# Altium PCB CW6680E LQFP48 BT Boombox S10 V1.0.PcbDoc (part 2 of 2)
Units mil, origin at the board's own origin, x right, y up, seen from the top; angles counter-clockwise.
Board outline 2057.09 x 1663.06 mil, 2 copper layers (Top Layer, Bottom Layer); 63 components, 61 nets, 239 pads, 208 vias.
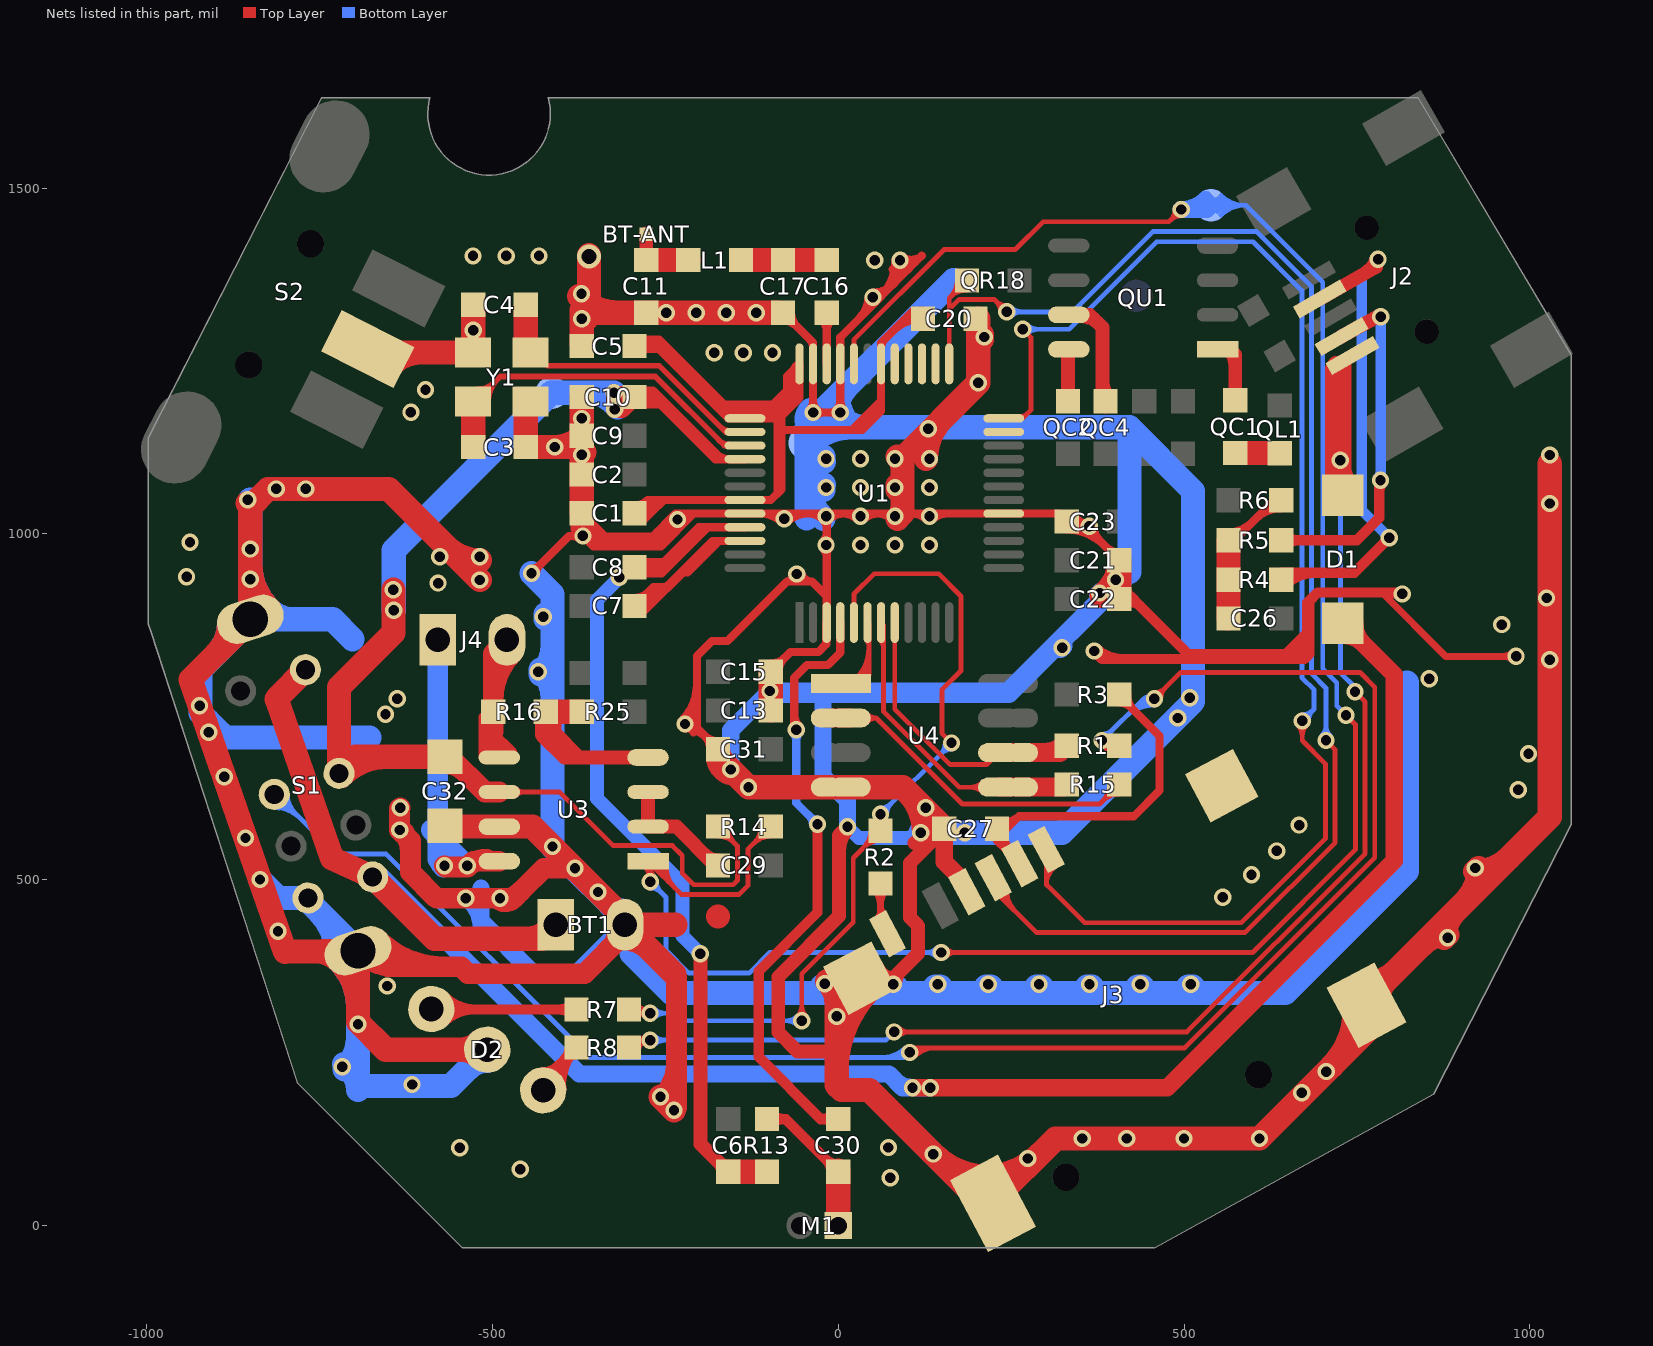
[diagram p2: the nets of this part, all layers, seen from the top]

## Via types
v1: diameter 25, hole 15, Top Layer to Bottom Layer, 206 vias
v2: diameter 28, hole 18, Top Layer to Bottom Layer, 1 vias
v3: diameter 35, hole 22, Top Layer to Bottom Layer, 1 vias

## Nets (pads, with @x,y where several pads share a name; then routed paths per layer and width w, separated by ;. In a path a pad name is that pad's centre, name@x,y a point inside that pad or via, vN(x,y) a via of type N, cw(c..) or ccw(c..) an arc to the next point about the centre after c; other vN are vias at no path point) (continued)
GND: BT1.2 C1.2 C2.2 C3.1 C4.1 C5.1 C9.1 C10.1 C11.2 C13.1 C15.1 C17.2 C20.2 C21.2 C22.2 C23.2 C27.2 C31.1 C32.1 D2.2 J3.6 J3.10 pad.0@-48.5,1131.53 S1.8 S1.9 S1.10 S2.2 U1.3 U1.17 U1.33 U1.35 U1.44 U3.7 U4.4 Y1.2 Y1.4 | length 25593.3
  Top Layer w7: U1.17@239.31,1029.26 272.94,1029.26
  Top Layer w10: C22.2@406.4,905.79 426.81,905.79 ; C22.2@417.54,900.11 cw(c426.81,895.38) 426.81,905.79 ; C22.2@417.54,911.47 ccw(c426.81,916.21) 426.81,905.79 ; 504.11,828.49 645.99,828.49 675.8,858.3 675.8,901.5 690.9,916.6 784.74,916.6 878.34,823 v1(980,823) ; v1@974.7,817.7 ccw(c961.89,804.89) 961.89,823 ccw(c961.89,841.11) v1@974.7,828.3
  Top Layer w11.81: v1(-443.3,943) -389.27,997.03 v1(-369.03,997.03) ; v1@-443.3,949.59 ccw(c-443.3,965.51) -432.04,954.26 ccw(c-420.79,943) v1@-436.71,943 ; -381,1006.54 cw(c-369.31,1006.54) C1.2@-369.96,1018.22 ; -381,1012.15 ccw(c-355.48,1012.15) v1@-372.51,993.15 ; C1.2@-378.8,1021.59 cw(c-398.59,1001.8) -370.6,1001.8 cw(c-342.61,1001.8) C1.2@-362.4,1021.59 ; v1@-373.69,992.37 ccw(c-384.95,981.11) -384.95,997.03 ccw(c-384.95,1012.95) v1@-373.69,1001.69 ; C1.2@-371.15,1013.93 cw(c-369.28,998.99) -358.64,1009.64 ; C1.2@-370.77,1029.93 ccw(c-357.41,1019.22) v1@-369.51,1007.12 ; C1.2@-370.6,1018.2 cw(c-370.6,990.21) -350.8,1010 cw(c-331.01,1029.79) -359,1029.79 ccw(c-311.23,1029.79) -345.01,996.01 ; -370.6,1049 C1.2@-381,1038.6 ; v1@-369.68,1002.21 cw(c-365.47,968.66) -341.57,992.57 ; C1.2@-369.4,1020.4 cw(c-386.02,1003.79) v1@-364.18,995.1 ; v1@-364.63,1001.94 cw(c-331.78,1038.59) C1.2@-381,1038.59 ; C1.2@-361.55,1022.54 ccw(c-347.06,1010.93) v1@-360.19,997.8 ; -356.71,1007.71 cw(c-367.86,996.56) -353.21,990.74 ; -262.91,1001.48 cw(c-232.21,970.78) -232.21,1014.19 ccw(c-232.21,998.27) -243.47,1009.53 ccw(c-254.73,1020.79) v1@-238.81,1020.79 ; -248.89,989.37 ccw(c-274.26,1014.75) v1@-238.74,1019.85 ; -232.2,1006.06 ccw(c-245.08,1018.94) v1@-227.05,1021.53 ; v1@-228.97,1026.53 ccw(c-220.78,1041.04) -209,1029.26 ; v1@-226.06,729.76 ccw(c-279.32,783.02) -204,783.02 ; v1@-221.4,718.51 cw(c-221.4,674.83) C31.1@-190.52,705.71 ; v1@-219.49,718.79 cw(c-213.33,698.37) -198.26,713.45 ; v1@-217.71,721.41 ccw(c-250.81,754.51) -204,754.51 ; -209.36,713.06 ccw(c-222.29,725.99) -204,725.99 ; C31.1@-185.19,688.79 ccw(c-213.18,688.79) -193.39,708.59 ccw(c-173.6,728.38) C31.1@-173.6,700.39 ; C31.1@-173.6,688.79 -204,719.2 -204,823.64 -182.44,845.2 -160.05,845.2 -74.19,931.05 -37.74,931.05 ; U1.44@-111.44,1029.26 cw(c-111.44,988.56) v1@-82.66,1017.34 ; C15.1@-97.6,800.79 -69.05,829.34 -28.49,829.34 -17.32,840.52 -17.32,871.06 U1.3@-16.6,871.78 -16.6,909.91 ; C15.1@-97.6,812.39 ccw(c-97.6,840.38) -77.8,820.59 ccw(c-58.01,800.79) C15.1@-86,800.79 ; C17.2@-79.6,1308.2 cw(c-79.6,1280.2) -59.8,1300 cw(c-40.02,1319.79) C17.2@-68,1319.79 ; C17.2@-79.6,1319.79 -36.28,1276.48 U1.35@-36.28,1245.79 v1(-36.28,1175.48) v1(3.09,1175.48) U1.33@3.09,1245.79 3.09,1284.27 120.86,1402.04 cw(c106.49,1416.41) v1@93.51,1400.77 ; -76.8,928.45 cw(c-60,911.65) v1@-60,935.41 ; v1@-73.34,1017.34 cw(c-44.56,988.56) -44.56,1029.26 ; v1@-65.07,940.78 ccw(c-52.73,943.75) -52.73,931.05 ; v1@-53.59,943.54 ccw(c-37.74,947.35) -37.74,931.05 ; -42.49,1029.26 cw(c-42.49,1000.51) -22.16,1020.84 cw(c-35.6,1007.4) -16.6,1007.4 ; -41.28,1281.48 cw(c-53.34,1269.41) U1.35@-36.28,1269.41 ; v1@-40.95,1180.14 ccw(c-52.2,1191.4) -36.28,1191.4 ccw(c-20.36,1191.4) -31.62,1180.14 ccw(c-20.36,1191.4) -20.36,1175.48 ccw(c-20.36,1159.56) v1@-31.62,1170.81 ; v1@-22.16,979.34 cw(c-35.6,965.9) -16.6,965.9 ; v1@-22.16,988.66 ccw(c-35.6,1002.1) -16.6,1002.1 ; -21.49,836.35 ccw(c-33.3,848.15) U1.3@-16.6,848.15 ; -16.6,970.26 cw(c-3.76,970.26) v1@-12.84,979.34 ; -16.6,997.74 ccw(c-3.76,997.74) v1@-12.84,988.66 ; -16.6,1011.76 cw(c-3.76,1011.76) -12.84,1020.84 cw(c7.49,1000.51) 7.49,1029.26 ; v1@-16.6,1028.26 -16.6,909.91 ; v1@-1.58,1170.81 ccw(c-12.83,1159.56) -12.83,1175.48 ccw(c-12.83,1191.4) -1.58,1180.14 ccw(c-12.83,1191.4) 3.09,1191.4 ccw(c19.01,1191.4) v1@7.75,1180.14 ; 7.34,1029.26 cw(c7.34,1000.51) v1@27.67,1020.84 ; 31.36,1312.54 ccw(c1.81,1342.1) v1@43.61,1342.1 ; v1@37,1020.84 cw(c57.33,1000.51) 57.33,1029.26 ; v1@50.2,1348.69 ccw(c50.2,1390.49) 79.76,1360.94 ; 57.17,1029.26 cw(c57.17,1000.51) v1@77.5,1020.84 ; v1@60.21,1341.39 ccw(c5.9,1395.7) v1@82.71,1395.7 ; 78.42,1382.6 ccw(c89.87,1396.38) 102.53,1383.72 ; 80.37,1361.55 ccw(c46.22,1395.7) v1@94.52,1395.7 ; v1@85.97,1391.69 ccw(c98.18,1406.4) 111.7,1392.88 ; v1@86.83,1020.84 cw(c107.16,1000.51) 107.16,1029.26 ; 100.53,1381.71 ccw(c86.55,1395.7) 106.33,1395.7 ; 107.01,1029.26 cw(c107.01,1000.51) v1@127.34,1020.84 ; v1@136.66,1020.84 cw(c156.99,1000.51) 156.99,1029.26 ; 283.68,1029.26 U1.17@239.31,1029.26 ; C23.2@330.26,1017.96 cw(c340.2,1005.95) 351.22,1016.97 ; C23.2@330.4,1006.2 cw(c330.4,929.92) 384.34,983.86 ; C23.2@330.4,1018.01 cw(c330.4,970.25) v1@364.18,1004.02 ; C23.2@330.68,1017.79 cw(c330.68,978.68) v1@358.34,1006.34 ; C23.2@337.79,1008.86 cw(c348.51,995.9) v1@360.4,1007.79 ; C23.2@340.46,1012.03 cw(c350.4,1006.34) 350.4,1017.79 ; C23.2@340.46,1023.55 ccw(c350.4,1029.24) 350.4,1017.79 ; v1@369.59,1011 ccw(c399.53,1011) 378.36,989.83 ; C21.2@394.81,961.79 ccw(c366.82,961.79) 386.61,981.59 ccw(c406.4,1001.38) C21.2@406.4,973.39 ; C21.2@406.4,961.79 350.4,1017.79 ; C1.2@-381,1038.6 -381,1009 -360,988 ; v1@-370.6,1008.2 cw(c-356.29,1008.2) -364.19,1020.13 ccw(c-356.29,1008.2) v1@-370.6,1008.2 ; v1@-370.6,1008.2 ccw(c-384.9,1008.2) -377,1020.13 cw(c-384.9,1008.2) v1@-370.6,1008.2 ; v1@-370.6,1008.2 C1.2@-370.6,1029.79 ; v1@-370.6,1008.2 -349.4,987 -276.55,987 -271.55,982 ; C1.2@-370.6,1029.79 -370.6,1021.6 -336,987 -266,987 -223.74,1029.26 -209,1029.26 ; C1.2@-370.6,1029.79 -370.6,998.6 -360,988 ; C1.2@-370.6,1029.79 -336.6,995.79 -268.6,995.79 -235.13,1029.26 -209,1029.26 ; -360,988 -354.2,982.2 -271.75,982.2 -271.55,982 ; -271.55,982 -256.26,982 -209,1029.26 ; -209,1029.26 ccw(c-209,1010.44) -226.19,1018.1 cw(c-209,1010.44) -209,1029.26 ; -209,1029.26 U1.44@-134.71,1029.26 ; -209,1029.26 U1.44@-134.71,1029.26 ; U1.44@-134.71,1029.26 U1.17@239.31,1029.26 ; -37.74,931.05 -16.6,909.91 ; U1.17@239.31,1029.26 318.94,1029.26 C23.2@330.4,1017.79 350.4,1017.79 ; C1.2@-370.6,1016.73 ccw(c-349.33,1016.73) -364.37,1001.69 cw(c-349.33,1016.73) C1.2@-370.6,1016.73
  Top Layer w15: v1(370.2,830.7) 381.8,819.1 673.7,819.1 680.9,826.3 680.9,902.8 693.4,915.29 810.89,915.29 812.2,916.6 v1(815.6,913.2) ; v1@373.74,834.24 ccw(c410.28,870.78) 410.28,819.1 ; v1@399.86,924.69 cw(c403.17,915.14) C22.2@410.32,922.29 ; C22.2@400.13,913.58 ccw(c389.55,926.7) v1@406.4,926.7 ; C22.2@400.27,913.7 ccw(c390.57,926.2) v1@406.4,926.2 ; C22.2@403.5,909.86 cw(c412.96,896.59) 424.49,908.12 ; v1@406,933.79 ccw(c423.35,933.79) C22.2@411.08,921.53 ; C22.2@412.21,897.65 cw(c423.39,881.96) 437.02,895.59 ; C22.2@412.53,913.7 cw(c422.23,926.2) v1@406.4,926.2 ; C22.2@412.68,913.58 cw(c423.26,926.7) v1@406.4,926.7 ; 426.81,905.79 434,898.6 ; 504.11,828.49 434,898.6 ; 655.3,825.5 679.5,849.7 680.3,849.7 ; 673.4,819.1 673.4,825.5 ; 798.48,915.29 cw(c798.48,896.08) v1@812.06,909.66 ; v1@406.4,926.2 434,898.6 ; v1@406.4,926.2 v1@406.4,926.7 ; C22.2@404.77,910.52 cw(c411.88,889.96) 427.26,905.34 ccw(c411.88,889.96) C22.2@404.77,910.52
  Top Layer w20: -2.21,251.7 -58.7,251.7 -86.6,279.6 -86.6,359.5 1.3,447.4 1.3,564.4 v1(13.4,576.5) ; 1.3,541.25 cw(c48.65,541.25) v1@15.17,574.73 ; J3.10@31.39,357.79 v1@79.8,357.79 ; J3.10@52.54,357.79 cw(c52.54,321.75) J3.10@78.03,347.23 ; J3.10@57.44,344.23 cw(c79.79,332.59) v1@79.79,357.79 ; J3.10@57.44,371.35 ccw(c79.79,382.98) v1@79.79,357.79 ; v1@82.29,349 cw(c109.54,349) 90.27,368.27 ; 109.87,553.2 ccw(c120.97,570.81) 135.7,556.09 ; v1@120.53,570.11 ccw(c134.67,592.53) C27.2@153.4,573.79 103.66,524.05 103.66,445.34 115.44,433.56 115.44,393.44 v1@79.8,357.79 ; C27.2@145.9,573.79 cw(c127.8,573.79) 140.6,560.99 cw(c153.4,548.19) C27.2@153.4,566.29
  Top Layer w25: C27.2@153.4,573.79 153.4,525.79 J3.6@171.4,507.79
  Top Layer w30: S1.9@-686.44,392.43 ccw(c-642.44,436.43) -642.44,374.2 ; S1.9@-681.23,384.29 S1.9@-694.22,397.28 -674.28,397.28 -651.2,374.2 -545.3,374.2 -535.3,364.2 -366.8,364.2 -308.2,422.8 BT1.2@-308.2,434.9 ; S1.9@-665.23,413.64 ccw(c-570.01,508.85) -570.01,374.2 ; v1(-633,604) -634,603 v1(-634,572) -618.4,556.4 -618.4,511 -580.5,473.1 -469,473.1 ; v1@-632.23,573.77 cw(c-665.63,540.37) -618.4,540.37 ; v1@-490.19,471.02 ccw(c-480.86,484.96) -469,473.1 ; v1@-488.8,470.6 ccw(c-488.8,512.37) -459.27,482.83 ; v1(-380.5,516.7) -425.4,516.7 -456.65,485.45 -469,473.1 ; -328.68,402.32 ccw(c-350.36,424) BT1.2@-319.7,424 ; v1@-255.13,184.46 ccw(c-307.12,236.45) -233.6,236.45 ; v1(-237.38,166.72) -233.6,170.5 -233.6,360.3 -236.6,363.3
  Top Layer w35: -898.43,827.33 ccw(c-941.52,870.41) S1.10@-880.58,870.41 ; v1@-853.5,1044.3 ccw(c-853.5,1065.25) -838.69,1050.44 ; -849.83,956.82 ccw(c-756.88,956.82) S1.10@-822.61,891.09 ; -756.1,396.41 cw(c-755.41,347.51) S1.9@-721.33,382.58 ; S1.9@-721.45,382.7 cw(c-787.18,316.97) -694.22,316.97 ; S1.9@-684.25,407.25 S1.9@-694.22,397.28 ; S2.2@-675.19,1262.29 Y1.4@-527.6,1262.29 ; S2.2@-646.04,1244.32 cw(c-602.65,1200.94) -602.65,1262.29 ; C32.1@-572.6,577.79 -571.6,576.79 -498.6,576.79 -441.79,576.79 BT1.2@-311.79,446.79 ; -566.51,981.81 ccw(c-518.2,1030.12) v1@-518.2,961.8 ; Y1.4@-527.6,1259.39 C4.1@-527.6,1327.79 ; D2.2@-518.61,243.08 ccw(c-545.86,215.83) -545.86,254.37 ccw(c-545.86,292.91) D2.2@-518.61,265.66 ; v1(-518,933.3) -649.7,1065 -824.12,1065 -849.83,1039.29 S1.10@-849.83,876.5 -849.83,875.92 -936.28,789.48 -799.6,395.79 S1.9@-694.22,397.28 ; D2.2@-507.32,254.37 -654.18,254.37 -694.22,294.42 S1.9@-694.22,397.28 ; Y1.2@-451.6,1181.39 C3.1@-451.6,1125.59 C9.1@-372.4,1125.59 ; v1(-409.8,1125.59) ccw(c-409.71,1180.9) C9.1@-370.6,1141.79 ; C9.1@-385.31,1125.59 cw(c-385.31,1099.79) v1@-367.06,1118.04 ; v1@-374.54,1343.46 ccw(c-317.39,1400.61) -317.39,1319.79 ; C1.2@-370.6,1029.79 C9.1@-370.6,1141.79 ; C10.1@-370.6,1197.79 C9.1@-370.6,1141.79 ; C5.1@-370.6,1274.79 -370.6,1323.79 ; v1@-367.46,1343.46 ccw(c-385.21,1361.21) -360.12,1361.21 ; v3@-360.12,1402.78 -360.12,1331.32 -367.64,1323.79 -363.64,1319.79 C11.2@-277.44,1319.79 C17.2@-86.6,1319.79 ; BT1.2@-308.2,415 cw(c-308.2,366.95) -274.23,400.93 ; v1(-256.9,186.23) v1(-237.38,166.72) ; -236.6,363.3 -256.9,383.6 BT1.2@-308.2,434.9 -235.1,434.9 ; -173.8,447 -173.6,446.79 ; -165.82,670.02 cw(c-147.04,688.79) C31.1@-173.6,688.79 ; v1@-158.56,655.7 cw(c-129.67,688.79) C31.1@-173.6,688.79 ; v1@-156.81,654.71 cw(c-149.33,677.79) C31.1@-173.6,677.79 ; C13.1@-97.6,744.79 C15.1@-97.6,800.79 ; -71.6,633.79 U4.4@-17.06,633.79 ; v1@-15.86,353.34 cw(c-48.82,320.38) -2.21,320.38 ; -2.21,223.86 cw(c165.32,223.86) J3.10@46.86,342.32 ; v1@-2.21,308.36 cw(c80.82,308.36) J3.10@22.11,367.07 ; J3.10@31.39,357.79 -2.21,357.79 -2.21,203.08 4.87,196 45,196 208.98,32.02 J3.10@223.95,32.02 223.95,35.57 314.38,126 v1(609,126) 763.76,280.76 763.76,325.67 1028.63,590.55 1028.63,1101.5 ; v1@85.7,1021.96 ccw(c68.08,1039.58) 93,1039.58 ; v1@85.7,1063.46 ccw(c68.08,1081.08) 93,1081.08 ; v1@85.7,1070.54 cw(c68.08,1052.92) 93,1052.92 ; v1@85.7,1112.04 cw(c68.08,1094.42) 93,1094.42 ; v1@93,1029.26 93,1109 v1(202.4,1218.4) ; 99.45,627.74 cw(c39.71,568) v1@124.2,568 ; v1@127,1108.5 cw(c210.29,1108.5) 151.4,1167.39 ; v1@137.93,103.07 ccw(c214.71,179.85) 214.71,71.27 ccw(c214.71,179.76) 291.42,103.04 ; C27.2@153.4,573.79 93.4,633.79 U4.4@17.17,633.79 U4.4@-17.06,633.79 ; 181,1197 v1(202.4,1218.4) ; 202.4,1275.28 cw(c220.72,1275.28) v1@207.77,1288.24 ; C20.2@202.4,1294.12 ccw(c220.72,1294.12) v1@207.77,1281.16 ; C20.2@202.4,1310.9 v1(202.4,1218.4) ; v1@380.92,910.51 ccw(c342.07,961.79) C21.2@406.4,961.79 C22.2@406.4,905.79 ; v1@713.52,230.52 ccw(c633.87,310.16) J3.10@746.51,310.16 ; J3.10@759.14,349.42 ccw(c759.14,417.89) 807.55,369.47 ; J3.10@781.01,327.55 cw(c818.13,327.55) 791.88,353.8 ; 843.58,405.5 cw(c881,368.09) v1@881,421 ; v1@876,416 cw(c928.91,416) 891.5,453.42 ; 905.44,467.35 ccw(c855.79,517) v1@926,517 ; v1@921,512 ccw(c921,582.21) 970.65,532.56 ; C31.1@-173.6,677.79 C31.1@-173.6,688.79 ; C31.1@-173.6,677.79 v1(-129.6,633.79) U4.4@-17.06,633.79 ; v1@-367.06,1307.56 ccw(c-383.83,1324.33) -360.12,1324.33 cw(c-383.83,1324.33) v1@-367.06,1307.56
  Bottom Layer w20: v1(13.4,576.5) 29.7,560.2 157.5,560.2 ; 94.33,560.2 ccw(c94.33,592.87) v1@117.43,569.77 ; v1@120.97,569.77 ccw(c144.07,592.87) 144.07,560.2
  Bottom Layer w25: v1(-538.2,473.1) cw(c-562.27,434.05) -516.4,434.05 ; -516.4,487.9 -516.4,440.7 -439.9,364.2 -378.9,364.2 BT1.2@-308.2,434.9 ; -350.71,392.39 cw(c-308.2,349.88) BT1.2@-308.2,410 ; v1(-129.6,633.79) v1(-155.27,659.46) -155.27,716.22 v1@-100.99,770.5 ; -21.9,764.1 -21.9,649.69 13.4,614.39 v1(13.4,576.5)
  Bottom Layer w30: v1@-100.99,770.5 -15.5,770.5 246.5,770.5 421,945 ; 307.14,831.14 cw(c323.7,814.58) v1@323.7,838 ; v1@321.2,835.5 cw(c344.62,835.5) 328.06,852.06 ; 373.26,897.26 ccw(c356.02,914.5) v1@380.4,914.5 ; v1@377.9,912 ccw(c377.9,936.38) 395.14,919.14
  Bottom Layer w35: -912.4,731.57 cw(c-930.67,713.3) v1@-904.83,713.3 ; v1@-909.83,718.3 cw(c-909.83,692.45) -891.56,710.73 ; -898.82,826.38 ccw(c-942.86,870.41) S1.10@-880.58,870.41 ; -849.83,956.82 ccw(c-756.88,956.82) -822.61,891.09 ccw(c-787.39,926.3) -787.39,876.5 ; v1@-849.83,1049.3 S1.10@-849.83,876.5 ; v1(-835.87,500.28) -809.22,473.62 S1.8@-766.54,473.62 ; S1.10@-827.7,876.5 S1.10@-849.83,876.5 ; S1.8@-766.54,469.6 S1.9@-694.22,397.28 -694.22,205.22 -691,202 -559.69,202 D2.2@-507.32,254.37 ; -751.02,454.08 cw(c-813.89,391.2) S1.9@-724.97,391.2 ; S1.9@-721.45,382.7 cw(c-787.18,316.97) -694.22,316.97 ; v1@-713.99,233.73 cw(c-739.41,196.37) -694.22,196.37 ; v1@-713.26,226.06 ccw(c-759.24,272.04) -694.22,272.04 ; -702,847.7 -730.8,876.5 S1.10@-849.83,876.5 ; -677.5,705.8 -886.63,705.8 -921.96,741.13 -921.96,803.24 -849.83,875.37 S1.10@-849.83,876.5 ; D2.2@-523.28,254.37 cw(c-561.83,254.37) -534.57,227.12 cw(c-507.32,199.86) D2.2@-507.32,238.41 ; v1(-443.3,943) -413,912.7 v1(-413,548) ; v1@-429.96,797.06 ccw(c-470.92,838.02) -413,838.02 ; v1@-429.96,804.14 cw(c-470.92,763.18) -413,763.18 ; v1@-422.86,876.86 ccw(c-446.68,900.68) -413,900.68 ; v1@-422.86,883.94 cw(c-446.68,860.12) -413,860.12 ; v1@-413.9,548 -298.9,433 -298.9,393.6 -241.5,336.2 646.2,336.2 822.3,512.3 822.3,785 ; -329.54,463.64 ccw(c-308.2,484.98) BT1.2@-308.2,454.8 ; BT1.2@-299.2,424 ccw(c-226.54,424) -277.92,372.62 ; -46,1022.64 cw(c12.62,1022.64) v1@-20.31,1071.14 ; -46,1033 pad.0@-46,1154 ; -46,1051.77 cw(c39.23,1051.77) v1@-21.04,1112.04 ; -46,1082.23 ccw(c39.23,1082.23) v1@-21.04,1021.96 ; pad.0@-46,1123.73 ccw(c39.23,1123.73) v1@-21.04,1063.46 ; pad.0@-44.17,1127.2 cw(c20.53,1062.49) 20.53,1154 ; pad.0@-42.38,1131.53 cw(c20.62,1131.53) v1@-23.93,1176.07 ; -40.16,336.2 ccw(c-40.16,370.56) v1@-15.86,346.26 ; v1@-39.82,1171.94 ccw(c3.5,1215.26) 3.5,1154 ; -36.69,1154 ccw(c-36.69,1215.26) v1@6.62,1171.94 ; v1@-35.51,1164.49 cw(c3.09,1125.89) v1@3.09,1180.48 ; v1@-22.94,346.26 ccw(c1.36,370.56) 1.36,336.2 ; v1@-20.39,1104.42 cw(c14.79,1154) pad.0@-46,1154 ; v1@-1.91,1175.48 cw(c52.67,1175.48) 14.08,1214.08 ; v1@-0.45,1171.94 ccw(c42.87,1215.26) 42.87,1154 ; 60.96,336.2 ccw(c60.96,367.83) v1@83.33,345.46 ; v1@76.26,345.46 ccw(c98.62,367.83) 98.62,336.2 ; v1(119.2,568) v1(183,568) 316.8,568 323.5,568 513,757.5 513,1062 421,1154 ; 125.17,336.2 ccw(c125.17,367.83) v1@147.54,345.46 ; v1@140.46,345.46 ccw(c162.83,367.83) 162.83,336.2 ; 166.9,1366.9 pad.0@-46,1154 ; 198.29,336.2 ccw(c198.29,367.83) v1@220.66,345.46 ; v1@213.58,345.46 ccw(c235.95,367.83) 235.95,336.2 ; 271.41,336.2 ccw(c271.41,367.83) v1@293.78,345.46 ; v1@286.7,345.46 ccw(c309.07,367.83) 309.07,336.2 ; 344.53,336.2 ccw(c344.53,367.83) v1@366.9,345.46 ; v1@359.82,345.46 ccw(c382.19,367.83) 382.19,336.2 ; v1@404.54,930.26 ccw(c364.79,970.01) 421,970.01 ; 417.65,336.2 ccw(c417.65,367.83) v1@440.02,345.46 ; 421,945 421,1154 ; v1@432.94,345.46 ccw(c455.31,367.83) 455.31,336.2 ; 490.77,336.2 ccw(c490.77,367.83) v1@513.14,345.46 ; v1@506.06,345.46 ccw(c528.43,367.83) 528.43,336.2 ; pad.0@-46,1154 421,1154 ; -46,1164.09 cw(c-24.89,1164.09) -39.82,1179.01 ccw(c-24.89,1164.09) -46,1164.09
  other v1: 75.3,69.4 -459.6,81.6 274,97 137.58,103.42 -547,112.4 72.6,112.9 353,126 417,126 500,126 670,192 -616,204 705.67,222.67 -716.8,229.6 -694.22,291.1 -2.21,302.4 -651.8,346.4 79.79,349 144,349 217.12,349 290.24,349 363.36,349 436.48,349 509.6,349 -19.4,349.8 881,416 -809.85,425.33 -488.8,473.1 556.1,474.6 -347.2,482.2 597.5,507.2 921,517 634.1,541.7 -856.74,560.38 666.3,579 126.6,604.1 983,630 -887.41,648.71 998,682 -909.83,713.3 -221.4,725.1 491,733.9 -654.4,739.3 -923.17,751.7 -637.3,761.8 508.4,763.3 -98.7,772.79 854.4,790.7 -433.5,800.6 1028.63,818 323.7,835.5 959.3,868.9 -426.4,880.4 1024.1,907.3 377.9,914.5 -578.4,928.9 -849.83,934.2 401,933.79 -942,938 -60,942 -576.2,966.8 -518.2,966.8 -849.83,978 -17.5,984 32.33,984 82.17,984 132,984 -937,988 363,1011 -232.21,1020.79 -78,1022 -17.5,1025.5 32.33,1025.5 82.17,1025.5 132,1025.5 1028.63,1044 -853.5,1049.3 -812.4,1065 -769.8,1065 -17.5,1067 32.33,1067 82.17,1067 132,1067 -17.5,1108.5 32.33,1108.5 82.17,1108.5 132,1108.5 1028.63,1114 -370.6,1114.5 130,1152 -370.6,1166.9 -617.7,1175.9 -596.5,1208.4 -179.2,1262 -137.1,1262 -95,1262 211.3,1284.7 -527.6,1294.5 -370.6,1311.1 -248.4,1319.79 -205.13,1319.79 -161.87,1319.79 -118.6,1319.79 50.2,1342.1 -371,1347 53,1395.7 89.3,1395.7 -527.9,1401.83 -479.9,1401.83 -432.5,1401.83
  other v3: -360.12,1401.09
LED/TF_DECT: R2.1 R7.2 U1.5 | length 1472.6
  Top Layer w7: R7.2@-290.36,305.08 cw(c-277.29,297.07) v1@-277.29,312.39 ; R7.2@-290.36,319.71 ccw(c-277.29,327.72) v1@-277.29,312.39 ; R7.2@-287.51,312.39 cw(c-287.51,294.21) v1@-273.45,305.73 ; v1@-278.86,301.3 ccw(c-302.3,282.1) R7.2@-302.3,312.39 v1@-277.29,312.39 ; v1(-271.9,307) v1@-277.29,312.39 ; v1@-58.96,302.56 ccw(c-74.33,317.93) -52.6,317.93 ccw(c-30.87,317.93) v1@-46.24,302.56 ; v1(-52.6,296.2) -52.6,363.93 21.8,438.33 21.8,531.4 R2.1@61.1,570.7 ; U1.5@22.77,871.78 22.77,913.07 52,942.3 145.1,942.3 177.6,909.8 177.6,802.1 149.9,774.4 149.9,711.8 v1(163.9,697.8) ; R2.1@47.1,570.7 cw(c13.3,570.7) 37.2,546.8 cw(c61.1,522.9) R2.1@61.1,556.7
  Bottom Layer w7: v1(-271.9,307) -243.6,307 -232.8,296.2 v1(-52.6,296.2) ; v1@-265.54,300.64 cw(c-250.17,285.27) -250.17,307 cw(c-250.17,328.73) v1@-265.54,313.36 ; v1@-58.96,289.84 ccw(c-74.33,274.47) -74.33,296.2 ccw(c-74.33,317.93) v1@-58.96,302.56 ; v1(61.1,594.7) 163.9,697.5 v1(163.9,697.8) ; v1@61.1,603.7 ccw(c61.1,625.43) 76.46,610.06 ccw(c91.83,594.7) v1@70.1,594.7 ; 148.32,681.92 ccw(c132.45,697.8) v1@154.9,697.8 ; 149.05,682.65 cw(c163.9,667.8) v1@163.9,688.8
MD_RF: C16.2 U1.34 | length 118
  Top Layer w11.81: C16.2@-24.8,1311.59 cw(c-44.59,1291.8) -16.6,1291.8 cw(c11.39,1291.8) C16.2@-8.4,1311.59 ; U1.34@-16.6,1245.79 C16.2@-16.6,1319.79
MICIN: C30.1 U1.4 | length 982.9
  Top Layer w11.81: -63.6,739.96 ccw(c-37.43,739.96) v1@-55.93,721.46 ; v1(-60.6,716.79) -63.6,719.79 -63.6,791.79 -44.85,810.53 -14.86,810.53 3.09,828.48 U1.4@3.09,871.78
  Top Layer w15: v1(-29.9,580.3) -29.9,452.85 -115,367.75 -115,244 -25,154 C30.1@0,154 ; C30.1@-7.07,146.93 ccw(c-24.14,129.86) -24.14,154 ccw(c-24.14,178.14) C30.1@-7.07,161.07
  Bottom Layer w11.81: v1@-65.26,712.13 cw(c-76.52,700.87) -60.6,700.87 cw(c-44.68,700.87) v1@-55.93,712.13 ; v1(-60.6,716.79) -60.6,611 v1(-29.9,580.3) ; v1@-36.49,580.3 ccw(c-52.42,580.3) -41.16,591.56 ccw(c-29.9,602.81) v1@-29.9,586.89
MP3-BT: R1.2 S1.4 | length 2990.7
  Top Layer w7: v1(103.3,250.4) 102.37,251.33 102.37,252.68 106.69,257 500.87,257 775.7,531.83 775.7,778.5 754.4,799.8 495.5,799.8 v1(457.2,761.5) ; v1@104.71,248.99 cw(c124.06,229.64) 124.06,257 ; v1@109.66,244.04 cw(c140.96,212.74) 140.96,257 ; v1@457.2,770.5 ccw(c457.2,792.23) 472.56,776.86 ccw(c487.93,761.5) v1@466.2,761.5
  Top Layer w15: v1(381.4,701.4) 389.01,693.79 R1.2@406.4,693.79 cw(c406.4,719.89) v1@385.42,704.37
  Bottom Layer w7: S1.4@-815.2,604.39 cw(c-815.2,551.28) -777.64,588.84 ; S1.4@-815.2,611.39 cw(c-815.2,575.18) -789.59,600.79 ; S1.4@-803.2,623.39 ccw(c-781.47,623.39) -796.84,608.03 ; S1.4@-796.2,623.39 ccw(c-757.57,623.39) -784.89,596.08 ; -795.6,606.79 -725.84,537.04 -653.34,537.04 -359.3,243 95.9,243 v1(103.3,250.4) ; 63.71,243 ccw(c63.71,289.99) v1@96.94,256.76 ; 80.61,243 ccw(c80.61,273.09) v1@101.89,251.81 ; v1(381.4,701.4) 441.5,761.5 v1(457.2,761.5) ; v1@381.4,710.4 ccw(c381.4,732.13) 396.76,716.76 ccw(c412.13,701.4) v1@390.4,701.4 ; 415.03,735.03 cw(c457.2,692.87) v1@457.2,752.5 ; 426.98,746.98 cw(c457.2,716.77) v1@457.2,759.5 ; 438.93,758.93 cw(c457.2,740.67) v1@457.2,766.5
NetC16_1: C16.1 C17.1 L1.1 | length 124
  Top Layer w35: L1.1@-140.6,1395.79 C16.1@-16.6,1395.79
NetC26_2: C26.2 R4.1 R5.1 R6.1 | length 322
  Top Layer w11.81: R5.1@564.4,1000.79 582.4,1000.79 ; R5.1@564.4,1002.29 ccw(c564.4,1049.35) 597.68,1016.07 ; R5.1@571.33,999.99 ccw(c576.4,1006.79) 582.4,1000.79 ; 603.37,1021.76 cw(c640.4,984.72) R6.1@640.4,1037.1 ; R6.1@623.53,1041.92 cw(c640.4,1025.05) R6.1@640.4,1048.91 ; R6.1@640.4,1058.79 582.4,1000.79
  Top Layer w35: C26.2@564.4,877.69 R5.1@564.4,990.69
NetC29_1: C29.1 U3.2 U3.3 | length 196.7
  Top Layer w20: U3.3@-274.9,626.79 U3.2@-274.9,576.79 -233.79,576.79 -177.79,520.79 C29.1@-173.6,520.79 ; -193.56,536.56 ccw(c-173.6,556.53) C29.1@-173.6,528.29
NetC30_2: C30.2 M1.1 R13.2 | length 290.1
  Top Layer w15: R13.2@-103,154 -76,154 C30.2@0,78 ; R13.2@-95.93,146.93 cw(c-78.86,129.86) -78.86,154 cw(c-78.86,178.14) R13.2@-95.93,161.07 ; C30.2@-10,78 ccw(c-34.14,78) -17.07,95.07 ccw(c0,112.14) C30.2@0,88
  Top Layer w35: M1.1@0,0 C30.2@0,79.79
NetD2_1: D2.1 R7.1 | length 346.6
  Top Layer w15: D2.1@-588.22,313.15 -587.46,312.39 R7.1@-378.3,312.39 ; D2.1@-569.86,294.79 cw(c-527.36,252.29) -527.36,312.39 ; D2.1@-569.86,331.51 ccw(c-523.71,377.66) -523.71,312.39 ; R7.1@-385.37,305.32 ccw(c-402.44,288.25) -402.44,312.39 ccw(c-402.44,336.53) R7.1@-385.37,319.46
NetD2_3: D2.3 R8.1 | length 250.7
  Top Layer w15: D2.3@-426.42,195.59 -426.42,209.27 R8.1@-378.3,257.39 ccw(c-324.13,203.22) D2.3@-400.52,197.52 ; D2.3@-426.42,221.56 ccw(c-426.42,251.21) -405.45,230.24 ; D2.3@-415.48,196.41 cw(c-367.18,200.01) -401.43,234.26 ; R8.1@-388.3,257.39 cw(c-412.44,257.39) -395.37,240.32 cw(c-378.3,223.25) R8.1@-378.3,247.39
  Top Layer w35: D2.3@-426.6,195.77 D2.3@-426.42,195.59
NetJ2_2: J2.2 R5.2 | length 572.2
  Top Layer w15: R5.2@640.4,990.69 749.81,990.69 782.4,1023.29 782.4,1075.8 v1(784,1077.4) ; R5.2@647.47,983.62 cw(c664.54,966.55) 664.54,990.69 cw(c664.54,1014.84) R5.2@647.47,997.76 ; 782.4,1061.47 cw(c799.93,1061.47) v1@787.54,1073.86
  Top Layer w20: J2.2@727.76,1285.13 v1@783.08,1316.09
  Bottom Layer w15: v1@780.46,1080.94 ccw(c771.45,1089.95) 784.2,1089.95 ; v1(784,1077.4) 784.2,1077.6 v1(784.2,1314.1)
NetJ2_4: J2.4 R4.2 | length 783.4
  Top Layer w15: R4.2@640.4,943.79 746.19,943.79 v1(796.6,994.2) ; R4.2@647.47,926.62 cw(c688.93,885.17) 688.93,943.79
  Top Layer w20: J2.4@696.26,1339.68 777.5,1386.03 v1(780.5,1397) ; 762.38,1377.4 ccw(c745.79,1406.49) v1@778.09,1397.66
  Bottom Layer w15: v1(780.5,1397) 756.8,1373.3 756.8,1034 v1(796.6,994.2)
NetJ3_9: J3.9 R2.2 | length 158.7
  Top Layer w10: R2.2@52.26,485.86 cw(c30.92,464.52) 61.1,464.52 cw(c91.28,464.52) R2.2@69.94,485.86 ; J3.9@56.74,443.54 ccw(c46.23,454.06) 61.1,454.06 ; 61.1,463.67 ccw(c89.57,463.67) J3.9@69.44,443.54 ; R2.2@61.1,494.7 61.1,431.94 J3.9@71.32,421.72
NetQC1_1: QC1.1 QU1.1 | length 148
  Top Layer w20: QU1.1@548.4,1266.69 566.31,1266.69 574.1,1258.9 QC1.1@574.1,1192.7 ; QU1.1@564.99,1265.28 cw(c542.99,1243.28) 574.1,1243.28 ; QC1.1@568.8,1198.4 ccw(c555.99,1211.21) 574.1,1211.21 ccw(c592.21,1211.21) QC1.1@579.4,1198.4
NetQC1_2: QC1.2 QL1.2 | length 64
  Top Layer w11.81: QC1.2@574.1,1116.7 QC1.2@574.2,1116.6
  Top Layer w35: QC1.2@574.1,1117.1 QL1.2@637.96,1117.1
NetQC2_2: QC2.2 QU1.8 | length 103.8
  Top Layer w20: QC2.2@327.1,1197.1 ccw(c314.3,1209.9) 332.4,1209.9 ccw(c350.51,1209.9) QC2.2@337.71,1197.1 ; QC2.2@332.4,1191.79 332.4,1265.69 QU1.8@333.4,1266.69
NetQC4_2: QC4.2 QU1.7 | length 245
  Top Layer w20: QU1.7@333.4,1316.69 363.71,1316.69 382,1298.4 382,1188.2 QC4.2@386.4,1183.79 ; QU1.7@351.4,1314.69 cw(c351.4,1280.16) 375.82,1304.58 ; QU1.7@352.03,1314.79 cw(c357.49,1298.17) 369.86,1310.54 ; 382,1220.53 ccw(c415.14,1220.53) QC4.2@391.71,1197.1
NetR15_1: R15.1 U4.2 | length 724.7
  Top Layer w7: U4.2@-7.9,728.57 ccw(c-17.06,723.15) U4.2@-17.06,733.79 ; U4.2@-7.9,739.02 cw(c-17.06,744.43) U4.2@-17.06,733.79 ; U4.2@-1.07,726.52 cw(c16.48,708.98) 16.48,733.79 cw(c16.48,758.61) U4.2@-1.07,741.06 ; U4.2@21.5,733.79 55.11,733.79 ; U4.2@41.34,727.28 cw(c55.11,716) 55.11,733.79 ; U4.2@41.34,740.31 ccw(c55.11,751.59) 55.11,733.79 ; U4.2@44.71,733.79 U4.2@-17.06,733.79 ; 255.4,609.51 220.4,609.51 ; R15.1@392.4,637.79 cw(c358.6,637.79) 382.5,613.89 cw(c406.4,589.99) R15.1@406.4,623.79 ; R15.1@406.4,637.79 378.12,609.51 220.4,609.51 ; 55.11,733.79 179.39,609.51 220.4,609.51
  Top Layer w27.56: U4.2@-17.06,733.79 U4.2@17.17,733.79
NetR16_2: R16.2 R25.1 U3.4 | length 478
  Top Layer w20: -428.6,710.68 cw(c-390.69,710.68) R16.2@-417.49,737.49 ; R16.2@-428.6,742.79 -428.6,709.5 -395.89,676.79 -283.6,676.79 -374.49,676.79 -410.3,712.6 -410.3,741.89 R16.2@-409.4,742.79 ; R16.2@-426.21,736.11 cw(c-439.49,710.12) -410.3,710.12
  Top Layer w35: R16.2@-422.8,742.79 R25.1@-370.6,742.79
OUT+: J4.1 U3.8 | length 772.1
  Top Layer w7: U3.8@-499.1,527.3 -498.6,526.79 U3.8@-484.11,526.79
  Top Layer w11.81: U3.8@-512.3,527.3 U3.8@-499.1,527.3 ; U3.8@-501.2,529.4 -498.6,526.79 U3.8@-474.79,526.79 ; U3.8@-484.11,526.79 U3.8@-483.8,527.1
  Top Layer w30: v1(-569.2,520.2) -567.5,518.5 -536,518.5 -527.71,526.79 U3.8@-489.9,526.79 ; v1@-536.59,517.91 cw(c-507.9,489.21) -507.9,529.79 ccw(c-507.9,489.21) v1@-536.59,517.91
  Bottom Layer w30: -588.27,572.27 cw(c-640.33,520.2) v1@-566.7,520.2 ; J4.1@-586.93,827.77 cw(c-606.56,808.14) -578.8,808.14 cw(c-551.04,808.14) J4.1@-570.67,827.77 ; -578.8,537.34 ccw(c-552.06,537.34) v1@-570.97,518.43 ; -578.8,585.1 -578.8,562.8 v1(-536.2,520.2) v1(-569.2,520.2) -578.8,529.8 J4.1@-578.8,846.8
OUT-: J4.2 R16.1 U3.5 | length 598.8
  Top Layer w11.81: -512.69,693.43 ccw(c-493.26,693.43) U3.5@-507,679.69 ; -512.69,708.34 -512.69,676.79 -492.8,676.79 -470.39,676.79 -470.39,685.49 -498.8,713.9 ; -494.67,709.77 cw(c-525.04,679.39) U3.5@-482.2,676.22 ; -476.44,691.54 cw(c-491.09,676.88) U3.5@-470.42,675.35
  Top Layer w15: U3.5@-512.69,685.1 cw(c-441.11,685.1) R16.1@-491.73,735.72 ; -512.69,689.58 ccw(c-497.11,689.58) U3.5@-508.13,678.56 ; -512.69,721.32 cw(c-477.32,721.32) R16.1@-502.33,746.33 ; R16.1@-512.69,734.69 -512.69,676.79 U3.5@-489.9,676.79
  Top Layer w30: -498.8,713.9 R16.1@-498.8,742.79 -498.8,826.8 J4.2@-478.8,846.8 ; R16.1@-498.8,759.86 cw(c-402.76,759.86) J4.2@-470.67,827.77
  Top Layer w35: -498.8,694.44 -491.8,687.44 U3.5@-491.8,684.79
RF_LINE: BT-ANT.1 C11.1 L1.2 | length 92.7
  Top Layer w19.68: C11.1@-277.44,1402.79 BT-ANT.1@-277.44,1434.63
  Top Layer w35: C11.1@-277.44,1395.79 L1.2@-216.6,1395.79
RVDD: C1.1 C5.2 C20.1 U1.30 U1.36 U1.37 U1.43 | length 2666.7
  Top Layer w11.81: C1.1@-294.66,1029.58 ccw(c-288.85,1049.52) -274.16,1034.84 ; C1.1@-294.32,1041.38 ccw(c-293.71,1067.21) -275.45,1048.94 ; C1.1@-291.35,1040.92 ccw(c-282.48,1071.36) -260.06,1048.94 ; C5.2@-286.4,1263.29 cw(c-275.93,1252.83) -275.93,1267.63 ; C5.2@-286.4,1279.69 ccw(c-274.57,1291.52) -274.57,1274.79 ; C5.2@-286.14,1279.42 ccw(c-258.91,1304.96) -258.91,1267.63 ; C1.1@-285.38,1022.75 cw(c-271.15,1011.88) -271.15,1029.79 ; C1.1@-285.38,1036.83 ccw(c-271.15,1047.7) -271.15,1029.79 ; C5.2@-285.08,1264.87 cw(c-266.07,1251.62) -266.07,1274.79 ; C5.2@-283.22,1269.24 cw(c-269.4,1266.51) -269.4,1280.6 ; C1.1@-283.01,1030.07 cw(c-257.19,1030.68) -275.45,1048.94 ; C1.1@-279.21,1029.79 -275,1034 -260.06,1048.94 ; U1.37@-111.09,1167.05 cw(c-92,1151.17) -92,1176 ; -87.6,1148.79 -86.32,1150.07 34.68,1150.07 62.14,1177.53 U1.30@62.14,1245.79 ; -87.6,1162.05 -87.6,1058.79 -97.45,1048.94 ; -64,1202.78 cw(c-36.57,1202.78) U1.36@-55.97,1222.17 ; -64,1234.43 cw(c-51.95,1234.43) U1.36@-55.97,1245.79 ; 8,1150.07 20.07,1150.07 62.14,1192.14 U1.30@62.14,1245.79 ; 62.14,1207.53 U1.30@62.14,1245.79 ; U1.30@62.14,1269.41 cw(c78.84,1269.41) 67.03,1281.22 ; 78.8,1292.99 cw(c122.57,1249.21) C20.1@122.57,1311.12 ; 98.96,1313.15 cw(c122.57,1289.54) C20.1@122.57,1322.93 ; C20.1@108.81,1323 70.34,1284.53 62.14,1276.33 U1.30@62.14,1245.79 ; C1.1@-294.6,1029.79 -275.45,1048.94 ; C1.1@-294.6,1029.79 -271.15,1029.79 ; C1.1@-294.6,1029.79 -294.6,1027.6 -286,1019 -281.94,1019 -271.15,1029.79 ; C5.2@-294.6,1274.79 -287.43,1267.63 -258.91,1267.63 ; C5.2@-294.6,1274.79 -294.6,1280.6 -269.4,1280.6 ; C5.2@-294.6,1274.79 -266.07,1274.79 ; -275.45,1048.94 -208,1048.94 ; -271.15,1029.79 -252,1048.94 -208,1048.94 ; -269.4,1280.6 -164.81,1176 -92,1176 ; -269.4,1280.6 -258.6,1280.6 -221,1243 ; -266.07,1274.79 -158.33,1167.05 U1.37@-134.71,1167.05 -85.6,1167.05 -55.97,1196.68 -55.97,1212 U1.36@-55.97,1245.79 ; -260.06,1048.94 U1.43@-134.71,1048.94 ; -258.91,1267.63 -234.28,1243 -221,1243 ; -221,1243 -165,1187 -94,1187 -74,1207 -74,1227.76 U1.36@-55.97,1245.79 ; -208,1048.94 U1.43@-134.71,1048.94 ; U1.43@-134.71,1048.94 -97.45,1048.94 ; -97.45,1048.94 -82,1064.39 -82,1186 ; -92,1176 -82,1186 ; -82,1186 -64,1204 -64,1237.76 U1.36@-55.97,1245.79
SPI_CLK: R1.1 U1.8 U4.6 | length 796.7
  Top Layer w7: U1.8@81.83,871.78 81.83,746.67 162,666.5 214.88,666.5 U4.6@232.17,683.79 U4.6@266.4,683.79 ; U4.6@250.41,676.52 ccw(c232.87,658.98) 232.87,683.79 ccw(c232.87,708.61) U4.6@250.41,691.06 ; U4.6@257.24,678.56 cw(c266.4,673.15) U4.6@266.4,683.79 ; U4.6@257.24,689.02 ccw(c266.4,694.43) U4.6@266.4,683.79 ; U4.6@272.46,683.79 ccw(c272.46,751.73) R1.1@320.5,703.69 ; U4.6@282.39,676.52 cw(c299.94,658.98) 299.94,683.79 cw(c299.94,708.61) U4.6@282.39,691.06 ; U4.6@288.4,683.79 U4.6@266.4,683.79 ; 289.36,683.79 ccw(c289.36,734.83) R1.1@325.45,698.74 ; 306.26,683.79 ccw(c306.26,717.93) R1.1@330.4,693.79 320.4,683.79 U4.6@266.4,683.79
  Top Layer w27.56: U4.6@232.17,683.79 320.4,683.79 R1.1@330.4,693.79 ; 297.28,683.79 ccw(c297.28,726.92) R1.1@327.77,696.42
SPI_CS: U1.6 U4.1 | length 210.8
  Top Layer w7: U4.1@26.12,791.06 ccw(c-18.01,835.19) 44.4,835.19 ; U4.1@31.07,786.11 ccw(c-1.11,818.29) 44.4,818.29 ; U4.1@32.4,783.79 44.4,795.79 44.4,869.83 U1.6@42.46,871.78 ; U4.1@36.02,781.16 ccw(c15.79,801.39) 44.4,801.39 ; U1.6@40.76,846.45 cw(c31.95,837.65) 44.4,837.65
SPI_DAT: R15.2 U1.7 U4.5 | length 857.3
  Top Layer w7: U1.7@60.44,846.45 cw(c48.47,834.48) 65.4,834.48 ; U1.7@62.14,871.78 65.4,868.52 65.4,743.3 174.91,633.79 U4.5@232.17,633.79 U4.5@266.4,633.79 ; U4.5@208.68,626.52 ccw(c191.13,608.98) 191.13,633.79 ccw(c191.13,658.61) U4.5@208.68,641.06 ; U4.5@250.41,626.52 ccw(c232.87,608.98) 232.87,633.79 ccw(c232.87,658.61) U4.5@250.41,641.06 ; U4.5@257.24,628.56 cw(c266.4,623.15) U4.5@266.4,633.79 ; U4.5@257.24,639.02 ccw(c266.4,644.43) U4.5@266.4,633.79 ; U4.5@286.95,633.79 ccw(c286.95,681.25) R15.2@320.5,647.69 ; 301.4,633.79 U4.5@266.4,633.79 ; 303.85,633.79 ccw(c303.85,664.35) R15.2@325.45,642.74 ; 306.26,633.79 cw(c306.26,613.65) R15.2@320.5,627.89 ; R15.2@330.4,637.79 326.4,633.79 U4.5@266.4,633.79 ; 299.94,633.79 cw(c299.94,658.61) 282.39,641.06 ccw(c299.94,658.61) 299.94,633.79 ; 299.94,633.79 ccw(c299.94,608.98) 282.39,626.52 cw(c299.94,608.98) 299.94,633.79
  Top Layer w27.56: U4.5@232.17,633.79 R15.2@326.4,633.79 ; 311.76,633.79 ccw(c311.76,656.43) R15.2@327.77,640.42
TF-VDD: C27.1 J3.4 R3.1 | length 679.4
  Top Layer w11.81: C27.1@229.19,573.83 ccw(c258.25,569.24) 237.45,548.44 ; C27.1@229.34,573.59 ccw(c234.83,590.89) 247.66,578.05 ; C27.1@232.91,584.84 ccw(c241.44,611.75) 261.4,591.79 ; 233.03,552.86 ccw(c248.65,568.48) J3.4@252.77,546.78 ; C27.1@240.86,571.99 ccw(c286.59,564.77) J3.4@253.85,532.04 ; J3.4@262.51,523.38 229.4,556.48 C27.1@229.4,573.79 243.4,573.79 261.4,591.79 ; R3.1@406.4,756.2 cw(c406.4,733.09) 422.74,749.43 ; R3.1@406.4,774.79 406.4,765.77 464.4,707.77 464.4,628.79 427.4,591.79 261.4,591.79 ; R3.1@418,767.79 ccw(c450.88,767.79) 427.63,744.54
TF_CLK: J3.5 QR18.2 U1.25 | length 2377.4
  Top Layer w7: U1.25@160.57,1245.79 160.57,1340.87 QR18.2@186.1,1366.4 ; 160.57,1324.5 174.97,1338.9 225.7,1338.9 v1(243.6,1321) ; QR18.2@172.1,1366.4 cw(c138.3,1366.4) 162.2,1342.5 cw(c186.1,1318.6) QR18.2@186.1,1352.4 ; J3.5@224.27,503.05 224.27,485.93 286.4,423.79 588.47,423.79 718.4,553.72 718.4,688.2 v1(705.2,701.4) ; v1@234.6,1321 ccw(c212.87,1321) 228.24,1336.36 ccw(c243.6,1351.73) v1@243.6,1330 ; J3.5@235.97,487.58 ccw(c268.21,487.58) 245.41,464.78 ; J3.5@242.97,487.58 ccw(c292.11,487.58) 257.36,452.83
  Bottom Layer w7: v1(243.6,1321) 339,1321 455,1437 604.8,1437 684.4,1357.4 684.4,797.93 705.2,777.13 v1(705.2,701.4) ; v1@249.96,1314.64 cw(c265.33,1299.27) 265.33,1321 cw(c265.33,1342.73) v1@249.96,1327.36 ; v1@698.84,707.76 ccw(c683.47,723.13) 705.2,723.13 ccw(c726.93,723.13) v1@711.56,707.76
TF_CMD: J3.3 U1.24 | length 2168.3
  Top Layer w7: U1.24@239.31,1167.05 266.75,1167.05 278.6,1178.9 278.6,1284.1 v1(266.9,1295.8) ; U1.24@262.93,1169.46 ccw(c262.93,1184.49) 273.56,1173.86 ; 300.74,492.3 cw(c334.15,492.3) J3.3@314.98,519.66 ; 300.74,505.76 cw(c324.73,505.76) J3.3@310.96,525.4 ; J3.3@300.74,543.71 300.74,493.26 356.21,437.79 582.67,437.79 704.4,559.52 704.4,667.7 670.8,701.3 v1(670.8,729.6) ; v1@664.44,723.24 cw(c649.07,707.87) 670.8,707.87 cw(c692.53,707.87) v1@677.16,723.24
  Bottom Layer w7: v1(266.9,1295.8) 333.8,1295.8 460.3,1422.3 599.7,1422.3 670.4,1351.6 670.4,792.13 688,774.53 688,746.8 v1(670.8,729.6) ; v1@273.26,1289.44 cw(c288.63,1274.07) 288.63,1295.8 cw(c288.63,1317.53) v1@273.26,1302.16 ; v1@670.8,738.6 ccw(c670.8,760.33) 686.16,744.96 ccw(c701.53,729.6) v1@679.8,729.6
TP1: U1.29
TP2: U1.28
TP3: U1.27
TP4: U1.26
TP5: U1.23
USBDP/MUTE: pad.0@539,1475 R14.1 U1.32 U3.1 | length 3711.2
  Top Layer w7: U3.1@-280.91,520.78 cw(c-303.38,498.31) v1@-271.6,498.31 ; v1@-277.96,503.56 ccw(c-293.33,518.93) -271.6,518.93 ccw(c-249.87,518.93) v1@-265.24,503.56 ; U3.1@-276.2,529.56 ccw(c-273.64,529.19) U3.1@-275.47,527.36 ; U3.1@-275.96,525.73 cw(c-286.48,515.21) U3.1@-271.6,515.21 ; v1(-271.6,497.2) -271.6,523.5 U3.1@-274.9,526.79 -226.9,478.79 -143.31,478.79 -130.5,491.6 -130.5,543.89 R14.1@-97.6,576.79 ; -271.6,514.23 cw(c-262.34,514.23) U3.1@-268.89,520.78 ; U3.1@-269.27,528.57 ccw(c-256.33,526.71) U3.1@-265.58,517.47 ; U3.1@-262.34,527.57 ccw(c-239.03,524.23) -255.68,507.58 ; U3.1@-255.41,526.58 ccw(c-221.73,521.75) -245.79,497.69 ; U3.1@-248.48,525.59 ccw(c-204.43,519.27) -235.9,487.79 ; R14.1@-111.6,576.79 cw(c-145.4,576.79) -121.5,552.89 cw(c-97.6,528.99) R14.1@-97.6,562.79 ; U1.32@22.77,1245.79 22.77,1280.75 153.12,1411.1 256.06,1411.1 296.15,1451.19 478.19,1451.19 v1(496,1469) ; v1(148.8,394.8) 599.08,394.8 747.7,543.42 747.7,724.4 v1(734.2,737.9) ; v1@155.16,388.44 cw(c170.53,373.07) 170.53,394.8 cw(c170.53,416.53) v1@155.16,401.16 ; v1@487,1469 cw(c465.27,1469) 480.64,1453.64 cw(c496,1438.27) v1@496,1460
  Bottom Layer w7: v1@-271.6,488.2 cw(c-271.6,466.47) -256.24,481.84 cw(c-240.87,497.2) v1@-262.6,497.2 ; v1(-271.6,497.2) -248.9,474.5 -248.9,398 -216,365.1 -128.7,365.1 -99,394.8 v1(148.8,394.8) ; v1@142.44,388.44 ccw(c127.07,373.07) 127.07,394.8 ccw(c127.07,416.53) v1@142.44,401.16 ; pad.0@539,1475 589,1475 700.41,1363.59 700.41,805.33 720.7,785.03 720.7,751.4 v1(734.2,737.9) ; pad.0@548.28,1465.72 cw(c570.68,1443.32) 570.68,1475 cw(c570.68,1506.68) pad.0@548.28,1484.28 ; pad.0@553.23,1460.77 cw(c587.58,1426.42) 587.58,1475 cw(c587.58,1523.58) pad.0@553.23,1489.23
  Bottom Layer w25: v1(496,1469) 533,1469 pad.0@539,1475 ; v1@497.66,1469 ccw(c497.66,1516.34) pad.0@531.14,1482.86
VBAT: BT1.1 D1.2 S1.1 S1.7 | length 2992.9
  Top Layer w25: v1@107.9,199.45 475.85,199.45 803.7,527.3 803.7,796.5 D1.2@729.4,870.79 ; D1.2@729.4,853.29 cw(c729.4,811.04) 759.28,840.92 cw(c789.15,870.79) D1.2@746.9,870.79
  Top Layer w35: -811.6,760.79 -731.79,530.93 S1.7@-672.93,504.04 -583.59,414.7 -428.4,414.7 BT1.1@-408.2,434.9 ; -809.6,764.24 S1.1@-770.26,803.58 ; -452.38,414.7 ccw(c-452.38,468.18) BT1.1@-414.56,430.36
  Bottom Layer w25: S1.7@-672.93,494.04 cw(c-672.93,436.44) -632.2,477.17 ; S1.7@-672.93,504.04 -659.07,504.04 -374.33,219.3 73,219.3 92.85,199.45 v1(133,199.45) ; 82.56,209.74 ccw(c107.4,234.58) v1(107.4,199.45)
VCM: C7.2 U1.46 | length 969.4
  Top Layer w11.81: C7.2@-294.6,889.6 C7.2@-294.6,893.79 ; C7.2@-294.45,907.39 ccw(c-293.87,953.87) -261,921 ; C7.2@-284,885 -213.06,955.94 -205.94,955.94 ; C7.2@-283,895.79 cw(c-254.96,895.79) -274.79,915.62 ; -274.84,915.57 cw(c-294.6,935.33) C7.2@-294.6,907.39 ; -262.54,908.85 cw(c-294.6,940.91) -294.6,895.58 ccw(c-294.6,946.7) -258.45,910.55 ; -242.38,929.02 cw(c-294.6,981.23) C7.2@-294.6,907.39 ; -238.29,930.71 cw(c-294.6,987.02) C7.2@-294.6,907.39 ; C7.2@-294.6,893.79 C7.2@-277.6,893.79 ; C7.2@-294.6,893.79 -288.21,893.79 -261,921 ; C7.2@-294.6,893.79 -294.6,895.81 -267.22,923.19 -248.21,923.19 -244.69,926.71 ; C7.2@-277.6,893.79 -268.2,903.2 -244.69,926.71 ; C7.2@-277.6,893.79 -181.51,989.89 U1.46@-134.71,989.89 -172,989.89 -205.94,955.94 ; -261,921 -260,920 ; -260,920 -251.4,920 ; -260,920 -251.4,920 ; -251.4,920 -244.69,926.71 ; -251.4,920 -215.45,955.94 -205.94,955.94 ; -244.69,926.71 -227.37,944.02 -217.86,944.02 -205.94,955.94
VDDDAC: C6.1 C8.2 R13.1 U1.45 | length 1771.7
  Top Layer w11.81: C8.2@-294.77,951.67 ccw(c-277.94,963.68) C8.2@-277.94,943 ; C8.2@-294.75,951.95 cw(c-276.51,933.71) -276.51,959.5 ; C8.2@-286.89,959.5 -238.5,959.5 ; C8.2@-285.16,958.53 ccw(c-255,980.05) -255,943 ; -248,959.5 ccw(c-248,905.2) C8.2@-286.4,943.59 ; C8.2@-294.6,951.79 -246.21,951.79 ; C8.2@-294.6,951.79 -285.8,943 -276.74,943 ; C8.2@-294.6,951.79 -294.6,947.4 -281.14,947.4 -276.74,943 ; C8.2@-294.6,951.79 -259.6,951.79 -201.82,1009.57 U1.45@-134.71,1009.57 -188.43,1009.57 -238.5,959.5 ; C8.2@-286.4,943.59 cw(c-266.61,923.8) -266.61,951.79 ; C8.2@-286.4,943.59 cw(c-266.61,923.8) -266.61,951.79 ; -276.74,943 -267.95,951.79 -246.21,951.79 ; -276.74,943 -255,943 ; -266.61,951.79 cw(c-266.61,979.78) -286.4,959.99 ccw(c-266.61,979.78) -266.61,951.79 ; -255,943 -246.21,951.79 ; -246.21,951.79 -238.5,959.5
  Top Layer w20: v1(-199.2,392.9) -199.2,118.2 C6.1@-159,78 ; C6.1@-166.5,78 ccw(c-184.61,78) -171.8,90.8 ccw(c-159,103.61) C6.1@-159,85.5
  Top Layer w35: C6.1@-159,78 R13.1@-103,78
  Bottom Layer w20: v1(-316.3,937.4) -316.3,937.09 -348.9,904.49 -348.9,617.5 -225.1,493.7 -225.1,418.8 v1(-199.2,392.9)
VMCU: C10.2 C32.2 pad.0@-414,1204 R14.2 S1.3 U1.40 U3.6 | length 2918.5
  Top Layer w7: U3.6@-498.6,626.79 -402.79,626.79 -325.29,549.29 -239.69,549.29 -225.5,535.1 -225.5,509.23 -209.06,492.79 -151.75,492.79 -145.6,498.94 -145.6,548.79 R14.2@-173.6,576.79 ; U3.6@-465.3,622.2 cw(c-454.21,611.1) -454.21,626.79 cw(c-454.21,642.49) U3.6@-465.3,631.39 ; R14.2@-173.6,562.79 cw(c-173.6,528.99) -149.7,552.89 cw(c-125.8,576.79) R14.2@-159.6,576.79
  Top Layer w11.81: v1@-319.34,1199.34 cw(c-308.08,1188.08) -308.08,1204 cw(c-308.08,1219.92) v1@-319.34,1208.66 ; C10.2@-304.87,1192.42 ccw(c-324,1182.41) v1(-324,1204) -300.8,1204 C10.2@-294.6,1197.79 ; C10.2@-294.79,1197.69 ccw(c-277.3,1207.42) C10.2@-277.3,1187.41 ; C10.2@-286.19,1189.81 cw(c-267.6,1172.16) -267.6,1197.79 ; C10.2@-286.19,1205.78 ccw(c-267.6,1223.43) -267.6,1197.79 ; C10.2@-284.47,1203.43 ccw(c-257.22,1218.6) -257.22,1187.41 ; C10.2@-283.16,1195.87 cw(c-270,1193.65) -270,1207 ; -176.26,1115.42 ccw(c-158.33,1133.35) U1.40@-158.33,1108 ; C10.2@-294.6,1197.79 -285.39,1207 -270,1207 ; C10.2@-294.6,1197.79 -284.21,1187.41 -257.21,1187.41 ; C10.2@-294.6,1197.79 -267.6,1197.79 ; -270,1207 -171,1108 U1.40@-134.71,1108 ; -270,1207 -267.83,1207 -168.83,1108 U1.40@-134.71,1108 ; -267.6,1197.79 -208.9,1139.1 ; -257.21,1187.41 -208.9,1139.1 ; -208.9,1139.1 -177.8,1108 U1.40@-134.71,1108
  Top Layer w20: C10.2@-300.34,1192.97 ccw(c-324,1173.11) v1(-324,1204) -300.8,1204 C10.2@-294.6,1197.79
  Top Layer w25: v1(-324,1204) -323,1203 v1(-323,1180) ; C10.2@-304.89,1187.5 cw(c-323,1205.61) v1(-323,1180) ; C10.2@-299.48,1198.88 cw(c-323,1204.09) v1(-323,1180) ; C10.2@-294.6,1197.79 -312.39,1180 v1(-323,1180)
  Top Layer w30: C32.2@-568.5,677.79 -561.69,677.79 -510.69,626.79 U3.6@-489.9,626.79 ; C32.2@-568.4,667.79 cw(c-568.4,627.47) -539.88,655.98
  Top Layer w35: S1.3@-718.06,650.27 cw(c-651.62,583.84) -651.62,677.79 ; v1(-643,919.1) -643,857 -721.59,778.41 S1.3@-721.59,653.81 -697.61,677.79 C32.2@-572.6,677.79
  Bottom Layer w35: v1(-642.5,889.7) -642.5,976.2 -414.7,1204 -362.1,1204 ; pad.0@-401.33,1204 -362.1,1204 ; v1(-324,1204) -362.1,1204 ; v1@-319.07,1183.09 ccw(c-362.1,1149.27) -362.1,1204
VUSB: D1.1 J2.1 R8.2 | length 2716.4
  Top Layer w7: R8.2@-302.3,257.39 R8.2@-291.59,268.1 ; R8.2@-295.45,255.96 cw(c-280.51,252.85) v1@-280.51,268.1 ; R8.2@-288.59,254.53 cw(c-271.9,251.05) v1(-271.9,268.1) R8.2@-291.59,268.1 ; v1@-278.71,262.21 ccw(c-291.59,251.06) R8.2@-291.59,268.1 ; v1@-278.71,273.99 cw(c-291.59,285.14) R8.2@-291.59,268.1 ; v1(80.8,280) 504.07,280 761.7,537.63 761.7,757.1 v1(747.1,771.7) ; v1@87.16,273.64 cw(c102.53,258.27) 102.53,280 cw(c102.53,301.73) v1@87.16,286.36
  Top Layer w25: D1.1@716,1082.46 cw(c750.14,1082.46) v1(726,1106.6) cw(c750.14,1130.74) 716,1130.74 ; 716,1130.4 ccw(c804.01,1130.4) 741.78,1068.17 cw(c771.65,1098.04) 729.4,1098.04 cw(c687.15,1098.04) D1.1@717.03,1068.17 ; J2.1@716,1239 716,1075 729.4,1075 D1.1@729.4,1055.79 ; D1.1@719.66,1070.33 ccw(c707.41,1088.6) 729.4,1088.6 ; J2.1@719.82,1244.96 cw(c696.67,1221.82) 729.4,1221.82 ; D1.1@729.4,1061.6 D1.1@729.4,1055.79 ; 729.4,1139.9 729.4,1142 ; J2.1@729.4,1246.42 729.4,1117.79 D1.1@729.4,1055.79 ; D1.1@733.06,1072.91 cw(c737.57,1094) 716,1094 716,1109.3 ccw(c760.27,1109.3) D1.1@738.15,1070.95 ; D1.1@739.15,1070.33 cw(c751.4,1088.6) 729.4,1088.6 ; D1.1@729.4,1055.79 729.4,1088.6
  Bottom Layer w7: v1(-271.9,268.1) 68.9,268.1 v1(80.8,280) ; v1@-265.54,261.74 cw(c-250.17,246.37) -250.17,268.1 cw(c-250.17,289.83) v1@-265.54,274.46 ; v1@719.64,1100.24 cw(c704.27,1084.87) 726,1084.87 cw(c747.73,1084.87) v1@732.36,1100.24 ; v1(726,1106.6) 726,799.53 747.1,778.43 v1(747.1,771.7)
XO_N: C3.2 U1.39 Y1.1 | length 627.8
  Top Layer w8: Y1.1@-527.6,1188.39 -488.49,1227.5 -264.42,1227.5 -164.61,1127.68 U1.39@-153,1127.68 ; Y1.1@-523.25,1208.95 ccw(c-523.25,1248.07) -495.58,1220.41 ; Y1.1@-513.6,1191.29 cw(c-486.8,1191.29) Y1.1@-505.75,1210.24 ; Y1.1@-505.6,1191.29 cw(c-459.49,1191.29) -492.09,1223.9 ; -172.3,1135.38 ccw(c-158.33,1149.35) U1.39@-158.33,1129.59 ; U1.39@-164.08,1127.68 U1.39@-134.71,1127.68
  Top Layer w35: C3.2@-527.6,1125.59 Y1.1@-527.6,1188.39
XO_P: C4.2 U1.38 Y1.3 | length 443.5
  Top Layer w8: Y1.3@-451.6,1274.79 -419.7,1242.9 -258.61,1242.9 U1.38@-162.81,1147.11 ; -169.68,1153.98 ccw(c-158.33,1165.33) U1.38@-158.33,1149.27 ; U1.38@-162.55,1147.37 U1.38@-134.71,1147.37
  Top Layer w35: Y1.3@-451.6,1266.39 -451.6,1274.79 C4.2@-451.6,1327.79
pads on no net: J2. J3.1 J3.2 J3.8 J3.14 J3.15 S1.2 S1.5 S1.6 S2.5 S2.6

## Polygon pours and split planes (outlines as drawn)
GND on Top Layer "GND" (solid, remove dead copper, pour order 1000): -1034.96,1729.3 1081.8,1729.3 1081.8,1274.32 1081.8,-62.1 720.25,-62.1 -1037.8,-62.1 -1037.8,1725.15
GND on Bottom Layer "GND" (solid, remove dead copper, pour order 1001): -1009.61,1707.3 1068.4,1707.3 1068.4,1261.26 1068.4,-48.9 713.47,-48.9 -1012.4,-48.9 -1012.4,1703.24

## Keep-outs
Keep-Out Layer:
  circle w0.39: c-319.27,80.79 r88.58
  circle w0.39: c909.96,1004.65 r88.58
  lines w0.39: -590.2,1630.77 -746.61,1630.77 -747.64,1628.74 -997.24,1138.86 -997.24,869.84 -993.87,859.45 -781.65,206.29 -543.08,-32.28 222.44,-32.28 457.09,-32.28 861.25,190.19 1059.84,579.96 1059.84,1258.66 838.18,1630.76 -419.3,1630.77 ; -590.15,1630.76 ccw(c-504.74,1607.27) -419.33,1630.76

## Other copper
Top Layer:
  rectangle net NetQC1_1: 565,1225 584.1,1278.7
  region net ADKEY: -728.64,1556.8 -760.41,1572.98 -974.89,1152.04 -943.13,1135.85
  rectangle net AGND: -90.73,458.9 -72.8,513.92
  rectangle net GND: -259.4,418.1 -108.1,466.3
  region: -122.39,438.83 -74.8,486.42 -96.94,508.55 -144.52,460.97
  pour cut-out: 811.73,1682.23 433.53,1467.3 711.55,945.78 1114.72,1178.33
  region net ANT: 757,1592.82 942,1272 788,1184 824,1122 1062,1259 833,1637 582.91,1492.57 666.82,1349.72 717,1380 717.67,1380.45 668.33,1459.99 793,1532
  pour cut-out: -747.64,1628.74 -987.8,1157.4 -997.24,1089.37 -1035.04,1089.37 -1035.04,1581.5 -987.8,1628.74
  pour cut-out: -682.67,1414.34 -806.07,1172.15 -708.5,1122.44 -586.22,1363.47
  pour cut-out: 363.4,1657.28 -844.9,1657.28 -844.9,1421.1 363.4,1421.1
  pour cut-out: -350,1421.2 -350,1334.66 -87.3,1334.7 -79.56,1319.76 -36.28,1275.66 -36.28,1175.48 3.09,1175.48 3.09,1284.27 36.2,1317.8 36,1421.6
  pour cut-out: 45.4,-32.3 45.4,169.5 18.9,196 -23.3,196 -92.31,265.01 -92.31,340.35 -139.46,340.35 -141.3,338.5 -140.6,337.8 -140.6,143.2 -105.62,143.2 -53.6,91.18 -53.6,-30.2
Bottom Layer:
  pour cut-out: 807.88,1684.01 429.68,1469.08 707.7,947.56 1110.88,1180.11
  pour cut-out: 475.4,1657.28 -844.4,1657.28 -844.4,1421.2 475.4,1421.2

## Silkscreen, mask and mechanical layers (free items; w line width, h text height)
Top Overlay:
  text "PREV" at -529.2,1368 h35
  text "P/P" at -733.34,1049.76 h35
  text "NEXT" at -741.6,1000.8 h35
  text "BT" at -918.27,924.96 h40
  text "OUT+" at -563.3,909.9 h35 r90
  text "OUT-" at -463.7,909.9 h35 r90
  text "NO.14-147" at 852.74,414.55 h55 r90
  text "2014.08.27" at 941.14,412.45 h55 r90
  text "BAT-" at -241.2,410.4 h40
  text "BAT+" at -611.6,372.3 h40
  text "MP3" at -802,313 h40
  text "BLUE" at -772.8,257.6 h40
  text "RED" at -516.1,9.8 h40
  text "MIC-" at -194.44,-6.54 h23.62
  text "MIC+" at 75.2,-12.99 h23.62
Bottom Overlay:
  text "DP" at 474.8,1461.3 h40
  text "DM" at 391.6,1330.5 h40
  text "VMCU" at -339.5,1242.5 h40
  text "GND" at -82,1111.6 h40
  text "CW6680E LQFP48 BT Boombox S10 V1.0" at 940.7,670.2 h55
  text "NO.14-147" at 755.55,564.56 h55
  text "2014.08.27" at 757.65,476.16 h55
Top Solder:
  rectangle: -455.7,1431.9 252.3,1666
Bottom Solder:
  rectangle: -455.7,1431.9 252.3,1666
Mechanical 1:
  circle w0.39: c-319.27,80.79 r88.58
  circle w0.39: c909.96,1004.65 r88.58
  lines w0.39: -590.2,1630.77 -746.61,1630.77 -747.64,1628.74 -997.24,1138.86 -997.24,869.84 -993.87,859.45 -781.65,206.29 -543.08,-32.28 222.44,-32.28 457.09,-32.28 861.25,190.19 1059.84,579.96 1059.84,1258.66 838.14,1630.83 ; -590.15,1630.76 ccw(c-504.74,1607.27) -419.33,1630.76 ; -419.3,1630.77 838.04,1630.77
Mechanical 2:
  circle w0.39: c-504.74,1607.27 r88.58
  circle w0.39: c909.96,1004.65 r88.58
  circle w0.39: c-319.27,80.79 r88.58
  lines w0.39: -747.64,1628.74 839.55,1628.57
  lines w1: -1084.46,1427.12 -1064.05,1416.72 ccw(c-838.53,1346) -988.87,1163.63 ; -1084.37,1427.29 -1048.71,1497.28 ; -1048.75,1497.3 -1028.31,1486.88 ; -1032.12,1309.9 -994.25,1322.21 ; -1032.08,1309.72 cw(c-838.46,1345.96) -970.52,1199.8 ; -1028.28,1486.92 cw(c-838.53,1346) -779.36,1574.82 ; -994.21,1322.21 cw(c-838.36,1346.34) -992.21,1381.01 ; -992.22,1380.96 -961.24,1379.8 ; -988.99,1163.73 -970.58,1199.86 ; -960.5,1210.97 -1050.62,1034.11 -919.59,630.85 ; -956.84,1450.42 cw(c-838.36,1346.34) -910.94,1486.34 -923.13,1523.89 ; -956.81,1450.45 -937.66,1426.08 ; -923.02,1523.94 cw(c-838.53,1346) -797.91,1538.75 -779.51,1574.86 ; -912.11,633.3 -1061.88,584.63 -1037.55,509.74 -887.77,558.41 ; -895.27,555.98 -760.9,142.45 ; -848.23,1086.26 cw(c-740.25,1296.36) -632.28,1506.45 ; -848.17,1086.23 -742.43,1031.92 -600.36,1310.75 ; -800.63,1524.73 -710.05,1702.5 ; -761.21,142.77 ccw(c28.65,897.57) -702.39,85.67 ; -713.33,70.17 ccw(c-666.54,34.13) -619.75,-1.9 ; -709.45,1703.06 cw(c28.65,897.57) 880.09,1582.15 ; -662.64,168.19 -600.27,120.13 -537.9,72.07 -513.87,103.25 -576.24,151.31 -638.61,199.38 ; -647.05,156.18 -713.32,70.18 -619.77,-1.91 ; -632.33,1506.48 -527.95,1452.87 -598.29,1314.8 ; -610.43,11.47 ccw(c28.65,897.57) 831.56,156.67 ; -553.5,84.08 -619.77,-1.91 ; 98.46,299.3 306.15,-91.3 636.38,84.29 704.94,89.53 833.56,157.92 661.16,482.14 ; 622.47,1433.35 936.15,1614.45 945.99,1597.4 ; 772.08,1174.22 1085.76,1355.32 1075.91,1372.37 ; 832.85,158.07 ccw(c28.65,897.57) 861.25,190.19 1090.32,639.77 ; 1033.57,1326.21 cw(c28.65,897.57) 1090.54,640.67 ; 945.99,1597.4 1075.91,1372.37 ; 945.99,1597.4 632.31,1416.3 762.24,1191.27 1075.91,1372.37 ; -977.8,835.49 -822.08,356.22 -559.98,441.38 -715.7,920.65 -977.8,835.49 ; -147.67,-12.48 95.71,66.6 150.46,-101.9 -92.92,-180.98 -147.67,-12.48
  text "BT" at -970.19,857.76 h40 r18
  text "MP3" at -800.16,302.11 h35 r18

## Text inside footprints (layer, text, board x,y; h text height)
M1: Top Overlay "+" at 14.44,-25.62 h40 r180